# Altium PCB TestPowerMergeBoard.PcbDoc
Units mil, origin at the board's own origin, x right, y up, seen from the top; angles counter-clockwise.
Board outline 4500 x 2400 mil, 2 copper layers (Top Layer, Bottom Layer); 20 components, 10 nets, 52 pads, 22 vias.
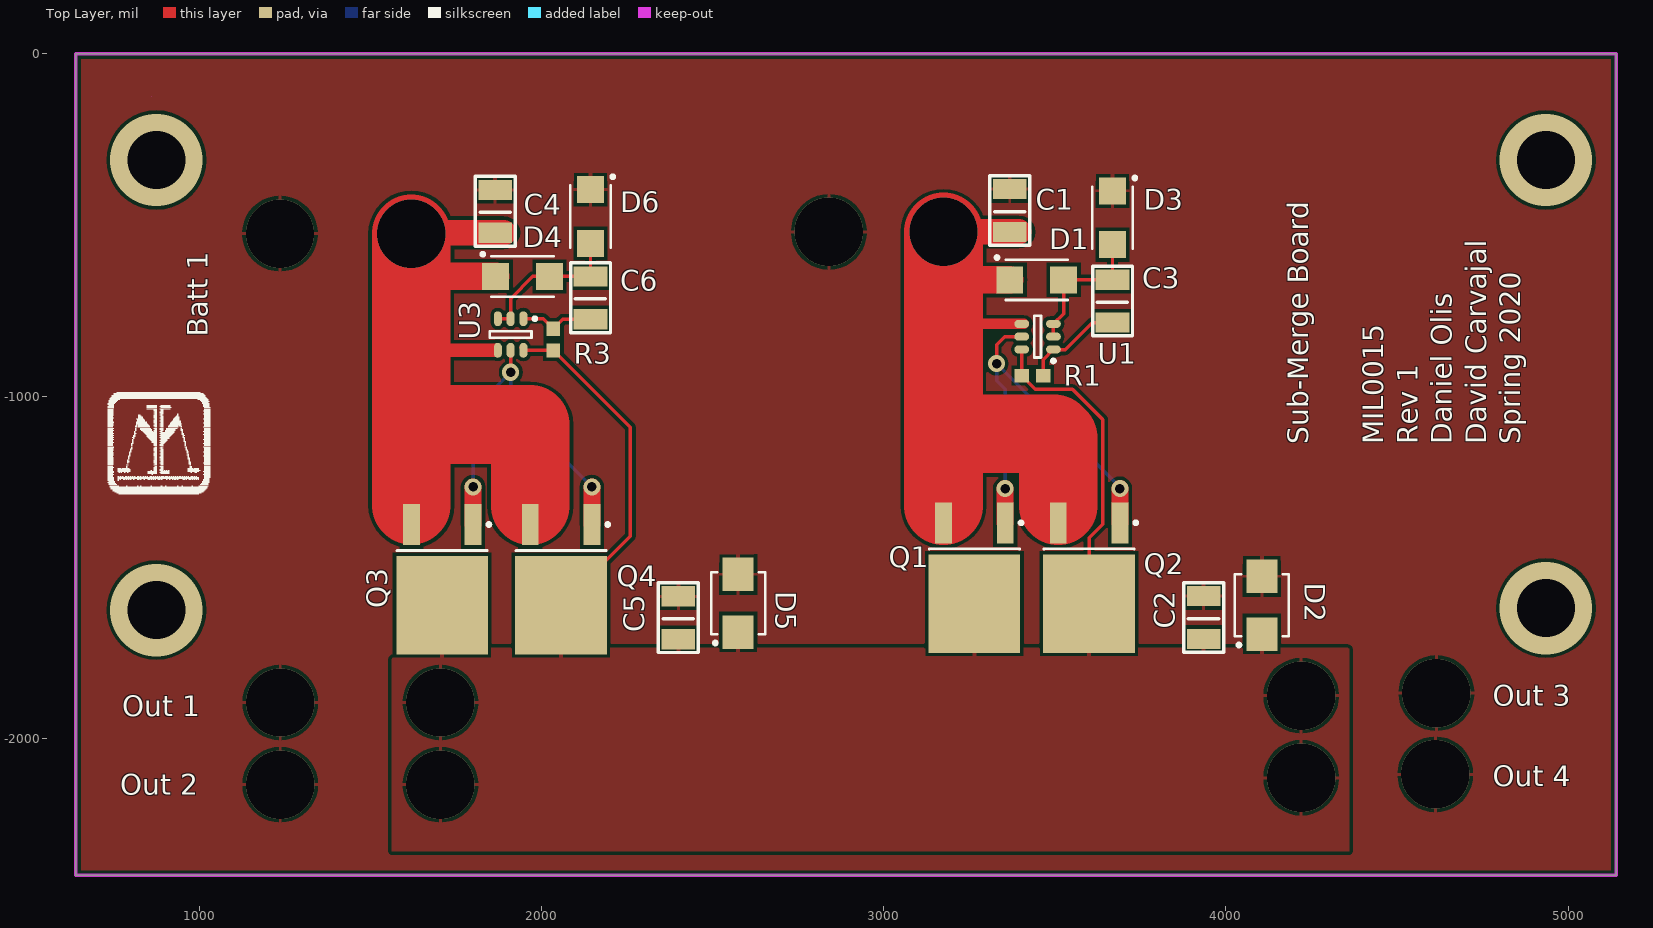
[diagram p0: Top Layer view]
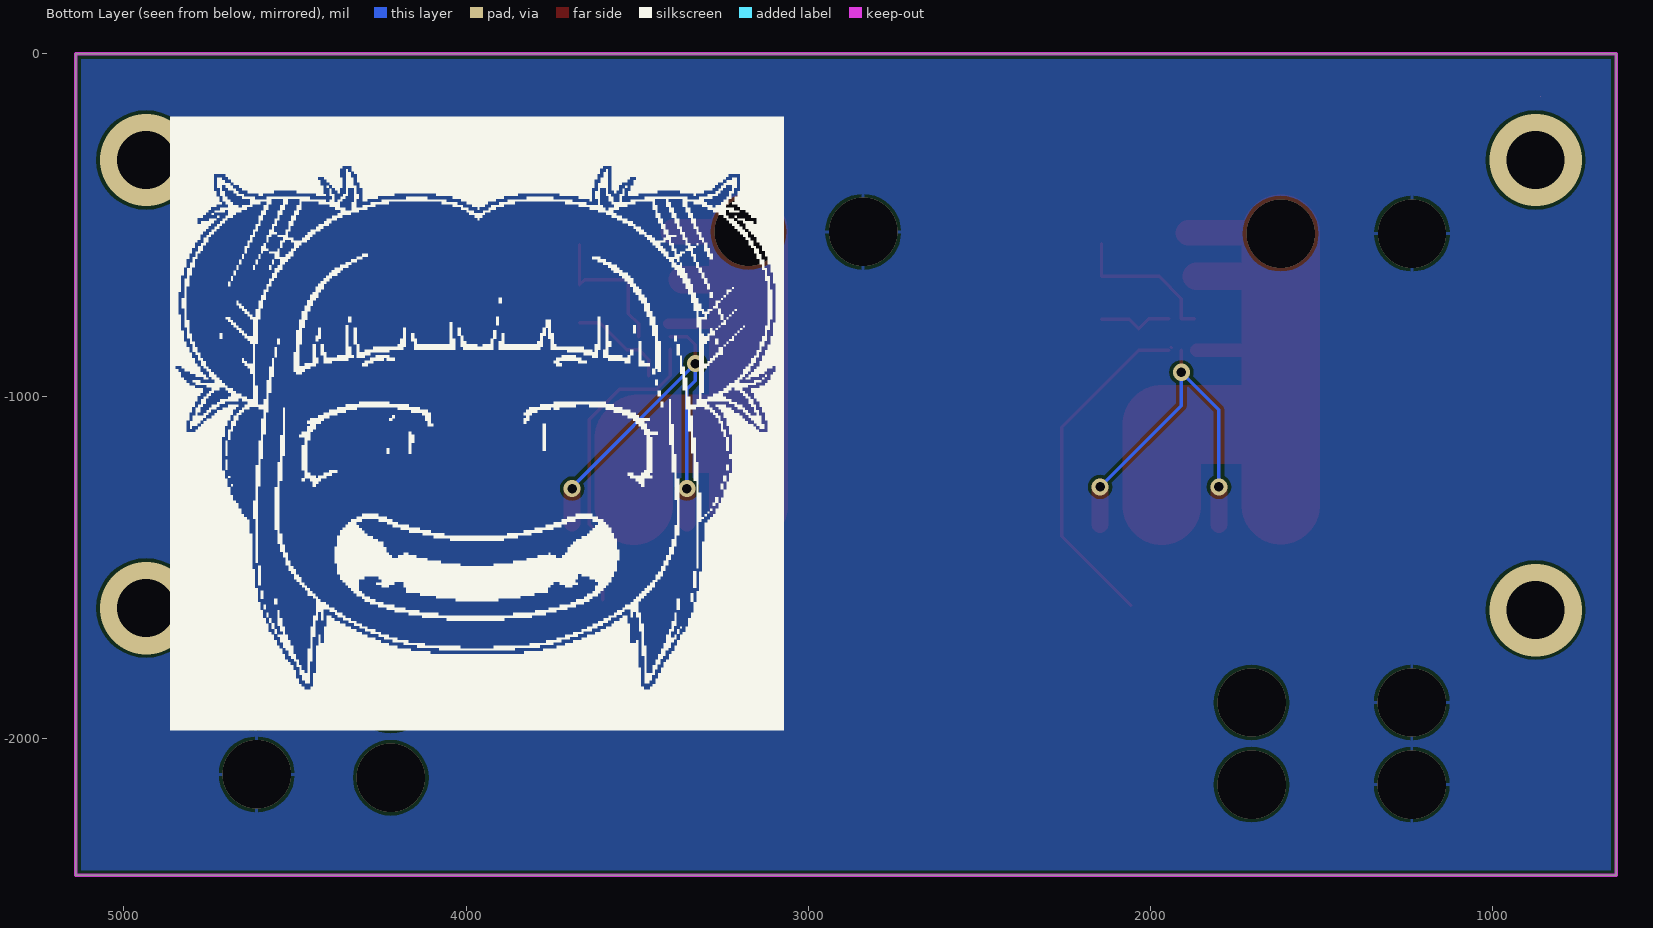
[diagram p1: Bottom Layer view, seen from below]

## Layer stack, top to bottom
Top Solder: solder mask 0.4, Solder Resist, Dk 3.5
Top Layer: signal copper 1.4
Dielectric 1: dielectric 12.6, FR-4, Dk 4.8
Bottom Layer: signal copper 1.4
Bottom Solder: solder mask 0.4, Solder Resist, Dk 3.5

## Board outline
640,-2400 5140,-2400 5140,0 640,0
cut-out: 860,-125

## Design rules (kind name [scope] priority, off if disabled: settings)
Clearance [All] p1: gap=10 ignorepadtopadclearanceinfootprint=FALSE except(0: Arc-Hole Track-Hole SMDPad-Hole THPad-Hole Via-Hole Fill-Hole Poly-Hole Region-Hole Text-Hole; 5: Track-Track Track-SMDPad SMDPad-SMDPad; 7: Track-Via)
HoleSize [All] p1: absolutevalues=TRUE maxlimit=150 minlimit=10 maxpercent=80.000 minpercent=20.000
MinimumAnnularRing [All] p1: minimumring=7
MinimumSolderMaskSliver [All] p1: minsoldermaskwidth=1
PolygonConnect [All] p1: connectstyle=Relief reliefconductorwidth=10 reliefentries=4 polygonreliefangle="90 Angle" airgapwidth=10
RoutingVias [All] p1: holewidth=10 width=22 viastyle="Through Hole" minholewidth=10 minwidth=22 maxholewidth=100 maxwidth=150
SilkToSolderMaskClearance [IsPad] p1: minsilkscreentomaskgap=5 clearancetoexposedcopper=TRUE
SolderMaskExpansion [All] p1: expansion=4
Width [All] p1: maxlimit=300 minlimit=8 preferedwidth=10
27 further rules are at their usual default settings.

## Components (designator, comment, footprint, x,y, rotation, side; value= is the part's Value field where it differs from the comment)
C1 "CAP1210" CAP1210 3368.52,-520.79 r270 top value=1uF
C2 "CAP1210" CAP1210 3935,-1710.2 r270 top value=22uF
C3 "CAP1210" CAP1210 3668.78,-785.79 r270 top value=100nF
C4 "CAP1210" CAP1210 1865,-523.18 r270 top value=1uF
C5 "CAP1210" CAP1210 2400,-1710.79 r270 top value=22uF
C6 "CAP1210" CAP1210 2143.52,-775.98 r270 top value=100nF
D1 "SS16T3G" SS16T3G 3447.26,-660 r0 top
D2 "SMBJ60A-13-F" SMBJ60A-13-F 4105,-1610.77 r90 top
D3 "SS16T3G" SS16T3G 3668.78,-478.54 r270 top
D4 "SS16T3G" SS16T3G 1945,-650 r0 top
D5 "SMBJ60A-13-F" SMBJ60A-13-F 2575,-1605 r90 top
D6 "SS16T3G" SS16T3G 2143.52,-475 r270 top
Q1 "IRFB3306PbF" IRLR3636PbF 3264.98,-1529.45 r270 top
Q2 "IRFB3306PbF" IRLR3636PbF 3600.14,-1529.45 r270 top
Q3 "IRFB3306PbF" IRLR3636PbF 1710.16,-1534.45 r270 top
Q4 "IRFB3306PbF" IRLR3636PbF 2057.4,-1534.45 r270 top
R1 "Res" RES0603 3435,-940 r0 top value=100
R3 "Res" RES0603 2035,-834.53 r90 top value=100
U1 "LM5050-1" LM5050 3449.78,-826 r180 top
U3 "LM5050-1" LM5050 1910,-819.76 r270 top

## Footprints (in the part's own frame and the unit in brackets; to place one, negate y for a bottom-side part, rotate by r counter-clockwise, add the part's x,y. Pads: shape width x height; smd on the part's side, far side on the other; paste and mask are expansions set on the pad)
CAP1210 [mm]
  rect 1.5x2.5 smd: 1(-0.02,0) 2(-3.2,0)
  silkscreen extent -4.2,-1.48 0.97,1.48, body extent -3.22,-1.25 0,1.26, height 2.5
IRLR3636PbF [mm] "D-PAK, 3-Pads, Body 6.2x6.7mm (max), IPC Medium Density"
  rect 7.3x6.8 smd: D(1.95,0)
  rect 3.05x1.25 smd: G(-4.05,2.29) S(-4.05,-2.29)
  silkscreen extent -4.17,-3.35 -2.1,3.59, body extent -2.55,-3.37 3.67,3.37, height 2.39
LM5050 [mm] "SOT23, 6-Leads, Body 2.90x2.80mm, Pitch 0.95mm, IPC Medium Density"
  oval 1.1x0.6 smd: 1(-1.175,0.95) 2(-1.175,0) 3(-1.175,-0.95) 4(1.175,-0.95) 5(1.175,0) 6(1.175,0.95)
  silkscreen extent -1.3,-1.55 0.25,1.92, body extent -0.87,-1.52 0.88,1.53, height 1.1
RES0603 [mm] "Chip Resistor, 2-Leads, Body 1.60x0.80mm, IPC Medium Density"
  rect 1.05x1 smd: 1(-0.8,0) 2(0.8,0)
  body extent -0.88,-0.48 0.87,0.47, height 0.8
SMBJ60A-13-F [mm] "TVS UNIDIRECT 600W 60V SMB"
  rect 2.5x2.3 smd: A(2.15,0) C(-2.15,0)
  silkscreen extent -3.07,-2 2.3,2, body extent -2.29,-1.97 2.28,1.97, height 2.62
SS16T3G [mm] "DIODE SCHOTTKY 60V 1A SMA"
  rect 2x2 smd: A(2,0) C(-2,0)
  silkscreen extent -3.07,-1.5 2.3,1.77, body extent -2.29,-1.46 2.28,1.46, height 2.2

## Part data
C1 C2 C3 C4 C5 C6: "CAP CER 10UF 50V 20% X5R 1210", Supplier Part Number 1=587-2225-1-ND, Supplier 1=Digi-Key
D1 D3 D4 D6: "DIODE SCHOTTKY 60V 1A SMA", Supplier Part Number 1=SS16T3GOSDKR-ND, Supplier 1=Digi-Key
D2 D5: "TVS UNIDIRECT 600W 60V SMB", Supplier Part Number 1=SMBJ60A-FDIDKR-ND, Supplier 1=Digi-Key
Q1 Q2 Q3 Q4: library part IRFx3306PbF, "HEXFET Power MOSFET", Supplier Part Number 1=IRFB3306PBF-ND, Heatsink=A10755-ND, Supplier 1=Digi-Key
R1 R3: Supplier Part Number 1=RMCF0603JT10K0CT-ND, Supplier 1=Digi-Key
U1 U3: library part LM5050, "High-Side OR-ing FET Controller", Supplier Part Number 1=LM5050MK-1/NOPBCT-ND, Supplier 1=Digi-Key

## Via types
v1: diameter 200, hole 200, Top Layer to Bottom Layer, 12 vias
v2: diameter 50, hole 28, Top Layer to Bottom Layer, 6 vias
v3: diameter 270, hole 170, Top Layer to Bottom Layer, 4 vias

## Nets (pads, with @x,y where several pads share a name; then routed paths per layer and width w, separated by ;. In a path a pad name is that pad's centre, name@x,y a point inside that pad or via, vN(x,y) a via of type N, cw(c..) or ccw(c..) an arc to the next point about the centre after c; other vN are vias at no path point)
Batt1: C1.1 D1.C Q1.S Q2.S U1.4 | length 1985.1
  Top Layer w30: 3174.83,-788.6 U1.4 U1.4@3410,-788.6
  Top Layer w75: v1(3174.83,-520) C1.1 C1.1@3395,-520
  Top Layer w80: 3174.83,-660 D1.C
  Top Layer w230: Q1.S@3174.83,-1320 3174.83,-1122 3186.83,-1110 3497.98,-1110 3509.98,-1122 Q2.S@3509.98,-1320 ; 3174.83,-1115 3174.83,-788.6 3174.83,-660 v1(3174.83,-520)
Batt3: C4.1 D4.C Q3.S Q4.S U3.4 | length 2195.5
  Top Layer w10: Q3.S@1615,-1370 Q3.S@1620,-1319 ; 1620,-1085 1622.24,-1082.76 ; 1620,-865 1621.02,-866.02 ; 1620,-655 1625,-650 ; v1(1620,-525) v1@1622.61,-522.39
  Top Layer w40: 1621.02,-866.02 U3.4@1865,-866.02
  Top Layer w75: v1@1622.61,-522.39 C4.1 C4.1@1890,-522.39
  Top Layer w80: 1625,-650 D4.C
  Top Layer w230: Q3.S@1620,-1319 1620,-1085 1620,-865 1620,-655 v1(1620,-525) ; 1622.24,-1082.76 1967.24,-1082.76 Q4.S@1967.24,-1320
GND: C1.2 C2.2 C4.2 C5.2 D2.A D3.C D5.A D6.C
  other v1: 1237,-2135 4612,-2105 1237,-1895 4615,-1867.5 1236.25,-525 2840,-520
NetC3_1: C3.1 R1.2 U1.1 | length 294.7
  Top Layer w10: R1.2 3466.5,-892.95 U1.1 ; U1.1@3496.04,-864.88 3530.12,-864.88 3610,-785 C3.1
NetC3_2: C3.2 D1.A D3.A U1.2 U1.3 | length 445.1
  Top Layer w10: U1.2 U1.3 3526,-758.64 D1.A 3653.78,-660 3668.78,-675 D3.A
NetC6_1: C6.1 R3.2 U3.1 | length 219.9
  Top Layer w10: U3.1 2005.47,-773.5 R3.2 2062.83,-775.2 C6.1
NetC6_2: C6.2 D4.A D6.A U3.2 U3.3 | length 452.6
  Top Layer w10: U3.3 U3.2 1910,-715 1975,-650 D4.A C6.2 D6.A
NetQ1_G: Q1.G Q2.G U1.5 | length 1228.1
  Top Layer w10: v2(3330,-905) 3330,-850 3354,-826 U1.5 ; Q1.G@3355,-1369.86 Q1.G
  Top Layer w50: Q1.G@3355,-1369.86 v2(3355,-1270) ; Q2.G v2(3690.3,-1270)
  Bottom Layer w10: v2(3355,-1270) 3355,-980 3330,-955 v2(3330,-905) 3690.3,-1265.3 v2(3690.3,-1270)
NetQ3_G: Q3.G Q4.G U3.5 | length 1109.9
  Top Layer w10: v2(1910,-930) U3.5
  Top Layer w50: Q3.G v2(1800.32,-1265) ; Q4.G v2(2147.56,-1265)
  Bottom Layer w10: v2(1800.32,-1265) 1800.32,-1039.68 v2(1910,-930) 1910,-1027.44 v2(2147.56,-1265) v2@2147.56,-1252.87
PWR_MERGE: C2.1 C5.1 D2.C D5.C Q1.D Q2.D Q3.D Q4.D R1.1 R3.1 U1.6 U3.6 | length 1919.4
  Top Layer w10: U3.6 R3.1 2260,-1091.02 2260,-1408.62 Q4.D ; U1.6 R1.1 3443.5,-980 3551.83,-980 3639.98,-1068.15 3639.98,-1373.85 3600.14,-1413.69 Q2.D@3600.14,-1595
  other v1: 1705,-2135 4220,-2115 1705,-1895 4220,-1875
copper on no net:
  other v3: 875,-1625 4935,-1619.3 875,-310 4935,-310

## Polygon pours and split planes (outlines as drawn)
GND on Bottom Layer "Bottom Layer-GND" (solid, pour order 150): 640,0 5140,0 5140,-2400 640,-2400
no net on Bottom Layer "Bottom Layer-No Net" (solid, pour order 108): 1685,-1555
GND on Top Layer "Top Layer-GND 7" (solid, pour order 148): 640,0 5140,0 5140,-2400 640,-2400
GND on Top Layer "Top Layer-GND 5" (solid, pour order 100): 1080,-2326.5 1380,-2326.5 1380,-153.5 1080,-153.5
PWR_MERGE on Top Layer "Top Layer-PWR_MERGE" (solid, pour order 104): 1563.08,-2330 4360,-2330 4360,-1734.97 1563.08,-1735.01
no net on Top Layer "Top Layer-No Net 5" (solid, pour order 142): 4300,-347.99
no net on Top Layer "Top Layer-No Net 6" (solid, pour order 140): 1640,120
no net on Top Layer "Top Layer-No Net 7" (solid, pour order 138): 1720,-200
GND on Top Layer "Top Layer-GND 2" (solid, pour order 114): 1900,-157 2805,-157 2805,-370 1900,-370
GND on Top Layer "Top Layer-GND 3" (solid, pour order 110): 2705,-1560 2800,-1560 2880,-1480 2975,-1480 2975,-157 2705,-157
GND on Top Layer "Top Layer-GND 4" (solid, pour order 106): 2445,-1560 2525,-1480 2620,-1480 2620,-157 1362.5,-157 1362.5,-370 2350,-370 2350,-1560
GND on Top Layer "Top Layer-GND 6" (solid, pour order 126): 4150,-1480 4490,-1480 4490,-2330 4740,-2330 4740,-1235 4150,-1235
GND on Top Layer "Top Layer-GND" (solid, pour order 124): 3885,-157 2975,-157 2975,-370 3885,-370
GND on Top Layer "Top Layer-GND 1" (solid, pour order 122): 4060,-1480 3985,-1555 3885,-1555 3885,-157 4150,-157 4150,-200 4150,-1480
no net on Top Layer "Top Layer-No Net 3" (solid, pour order 120): 3985,-1555
no net on Top Layer "Top Layer-No Net 4" (solid, pour order 112): 2785,-855
no net on Top Layer "Top Layer-No Net 1" (solid, pour order 26): 1268.52,-718
no net on Top Layer "Top Layer-No Net 2" (solid, pour order 22): 1226.4,-911
no net on Top Layer "Top Layer-No Net" (solid, pour order 16): 1257.4,-811.48
GND on Top Solder (solid): 2705,-372.5 2707.5,-370 2975,-370 2975,-1475 2970,-1480 2880,-1480 2805,-1555 2705,-1555
PWR_MERGE on Top Solder (solid): 1560,-2330 4360,-2330 4360,-1735 1560,-1735
GND on Top Solder (solid): 2350,-370 2615,-370 2620,-375 2620,-1470 2535,-1470 2450,-1555 2350,-1555
GND on Top Solder (solid): 4150,-370 3885,-370 3885,-1235 4150,-1235
GND on Top Solder (solid): 4720,-1235 3885,-1235 3885,-1565 3975,-1565 4060,-1480 4720,-1480
GND on Top Solder (solid): 4490,-2330 4740,-2330 4740,-1235 4490,-1235
GND on Top Solder (solid): 1170,-155 1170,-370 4150,-370 4150,-155
GND on Top Solder (solid): 1090,-2325 1380,-2325 1380,-155 1090,-155

## Keep-outs
Keep-Out Layer:
  the board outline again, w10

## Silkscreen, mask and mechanical layers (free items; w line width, h text height)
Top Overlay:
  drawing of 530 lines, arcs and shapes, not listed
  text "Batt 1" at 1025,-826 h60 r90
  text "Sub-Merge Board" at 4240,-1140 h60 r90
  text "MIL0015" at 4460,-1140 h60 r90
  text "Rev 1" at 4560,-1140 h60 r90
  text "Daniel Olis" at 4660,-1140 h60 r90
  text "David Carvajal" at 4760,-1140 h60 r90
  text "Spring 2020" at 4860,-1140 h60 r90
  text "Out 3" at 4780,-1905 h60
  text "Out 1" at 775,-1935 h60
  text "Out 4" at 4780,-2140 h60
  text "Out 2" at 770,-2165 h60
Bottom Overlay:
  drawing of 55 lines, arcs and shapes, not listed
BO:
  lines w10: 640,-2400 640,-1360 640,-20